# Altium PCB ESP32SSMB V1.4 .PcbDoc (part 2 of 2)
Units mm, origin at the board's own origin, x right, y up, seen from the top; angles counter-clockwise.
Board outline 43.94 x 35.18 mm, 2 copper layers (Top Layer, Bottom Layer), stack 1.671 mm thick; 76 components, 65 nets, 276 pads, 414 vias.
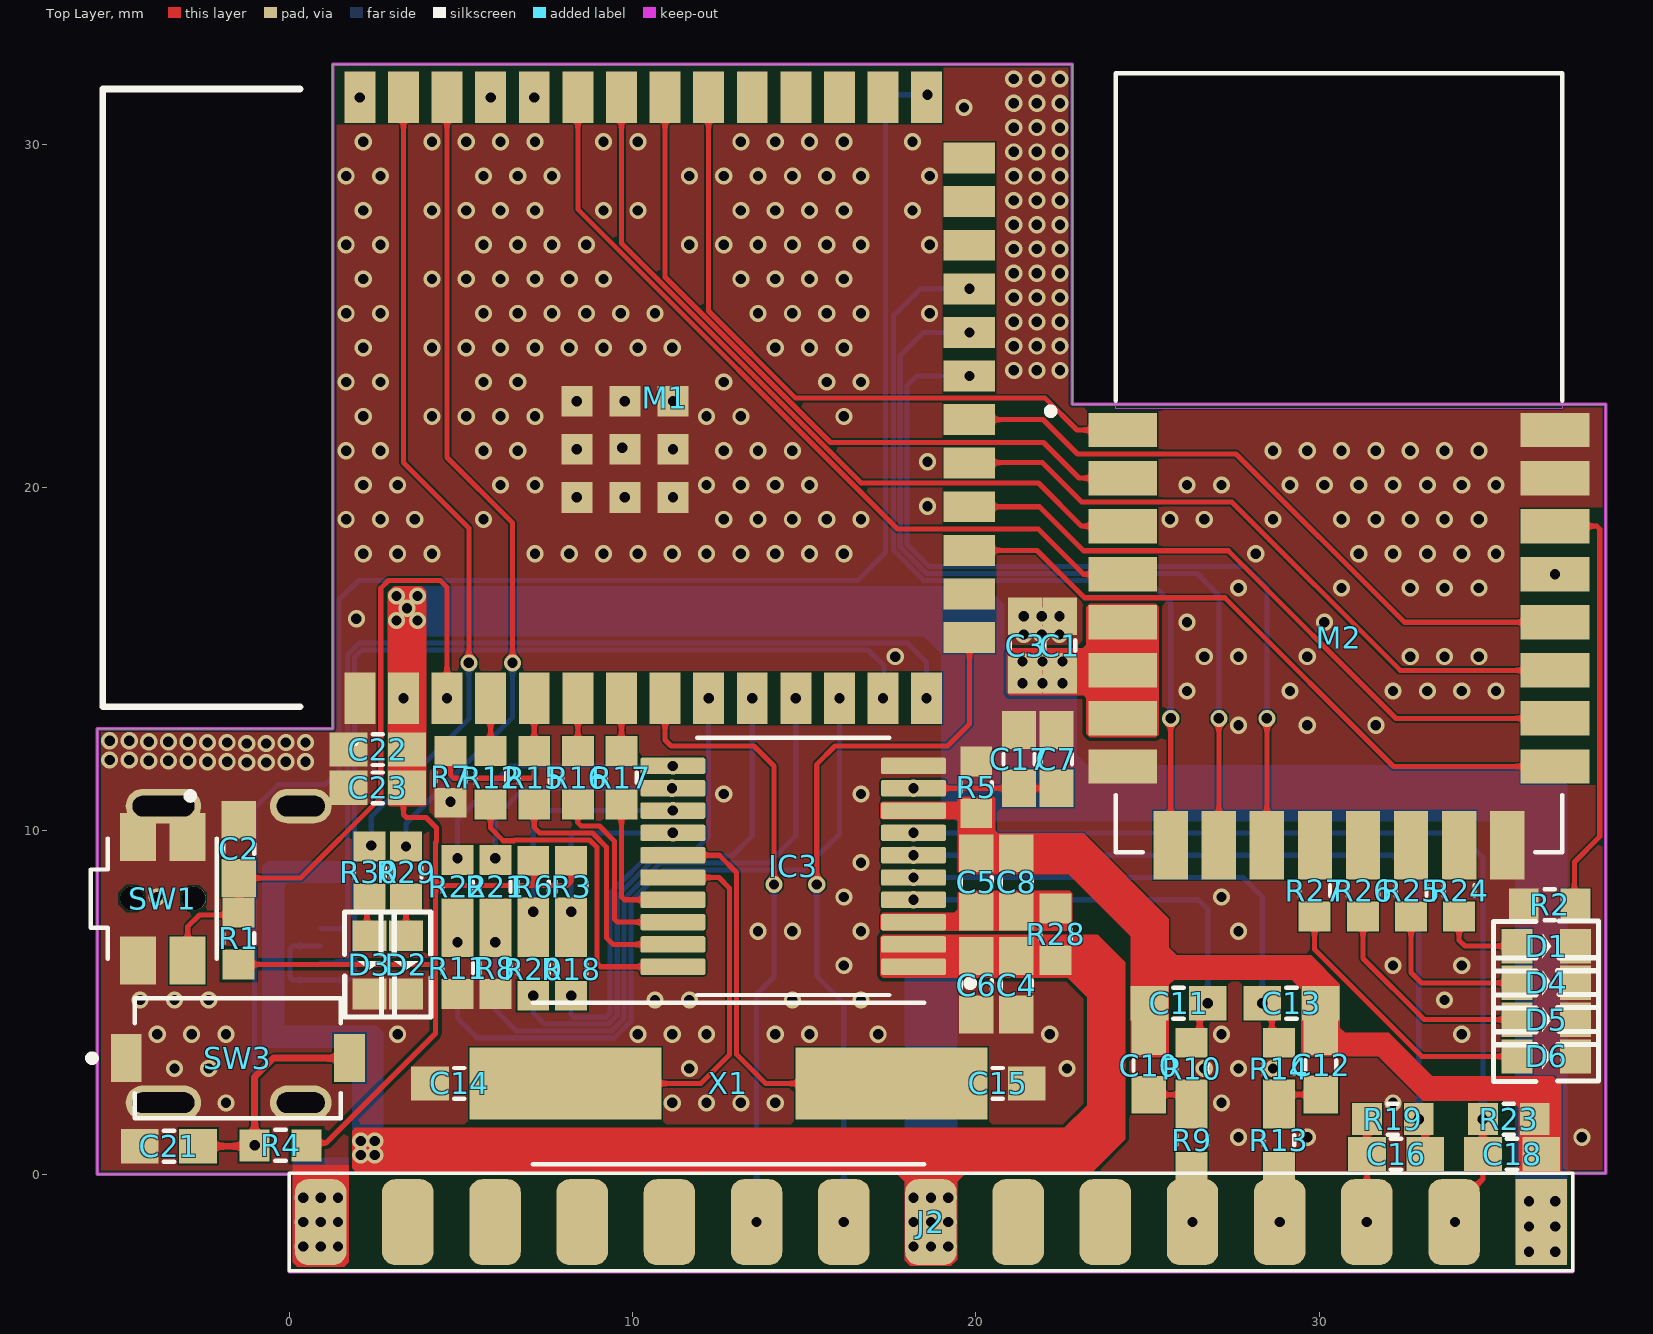
[diagram p0: Top Layer view]

## Via types
v1: diameter 0.5, hole 0.3, Top Layer to Bottom Layer, tented both sides, 414 vias

## Nets (pads, with @x,y where several pads share a name; then routed paths per layer and width w, separated by ;. In a path a pad name is that pad's centre, name@x,y a point inside that pad or via, vN(x,y) a via of type N, cw(c..) or ccw(c..) an arc to the next point about the centre after c; other vN are vias at no path point) (continued)
ADE-I\Q\R\: IC3.14 R3.2 R18.1 | length 6.1
  Top Layer w0.15: R18.1 R3.2 v1(8.211,7.643)
  Bottom Layer w0.15: v1(8.211,7.643) 8.211,9.853 8.299,9.941 v1(11.177,9.941)
ADE-MISO: M1.5 R7.2 R15.2 | length 5.5
  Top Layer w0.15: R7.2 4.699,11.633 4.801,11.532 7.047,11.532 7.135,11.619 7.135,12.327 R15.2 M1.5
ADE-MOSI: M1.4 R12.2 | length 1.5
  Top Layer w0.15: R12.2 M1.4
ADE-S\A\G\: IC3.13 R6.2 R20.1 | length 7.9
  Top Layer w0.15: R20.1 R6.2 v1(7.108,7.643)
  Bottom Layer w0.15: v1(7.108,7.643) 7.108,10.503 7.196,10.591 v1(11.177,10.591)
ADE-SCLK: M1.6 R16.2 | length 1.5
  Top Layer w0.15: R16.2 M1.6
ADE-ZX: M1.11 R8.2 R21.2 | length 20.3
  Top Layer w0.15: v1(6.005,6.756) R21.2@6.005,7.643
  Bottom Layer w0.15: v1(6.005,6.756) 6.005,4.79 6.623,4.172 9.386,4.172 9.757,4.543 9.757,8.023 10.799,9.065 13.967,9.065 14.757,9.855 v1(14.757,13.866)
AGND-ESP: C5.1 C8.1 C10.1 C11.1 C12.1 C13.1 C18.1 IC3.8 R5.1 R23.1
BOOT: C21.2 M1.27 R4.1 SW3.2 TP10.1 | length 55.2
  Top Layer w0.2: C21.2 -1.034,0.813 v1(-1.009,0.838) -1.009,2.826 -0.457,3.378 SW3.2
  Bottom Layer w0.15: v1(-1.009,0.838) -1.009,10.66 -0.323,11.346 1.043,11.346 1.445,11.748 1.445,16.722 2.02,17.297 16.561,17.297 17.374,18.11 17.374,31.115 17.704,31.445 v1(18.593,31.445)
CLK-IN: C15.1 IC3.15 X1.2 | length 12.2
  Top Layer w0.15: IC3.15 12.527,9.291 13.03,8.788 13.03,3.493 13.882,2.642 X1.2
CLK-OUT: C14.2 IC3.16 X1.1 | length 11.8
  Top Layer w0.15: X1.1 11.989,2.642 12.827,3.48 12.827,8.331 12.517,8.641 IC3.16
CUR-SHT-N-ESP: J2.07 J2.08 R13.1
  other v1: 28.854,-1.397
CUR-SHT-P-ESP: J2.09 J2.10 R9.1
  other v1: 26.314,-1.397
DN: J3.A7 J3.B7 M1.13 | length 29.6
  Bottom Layer w0.15: J3.A7 0.11,6.651 0.023,6.563 0.023,5.74 0.112,5.651 J3.B7 1.716,5.651 1.902,5.837 1.902,15.059 2.111,15.269 16.862,15.269 17.323,14.808 17.323,13.892 v1(17.297,13.866)
DP: J3.A6 J3.B6 M1.14 | length 28.8
  Bottom Layer w0.15: J3.A6 J3.A6@1.336,6.151 ; J3.B6 1.688,7.151 1.702,7.137 ; J3.A6@1.336,6.147 1.379,6.189 1.691,6.189 1.702,6.201 1.702,7.137 ; v1(18.567,13.866) 18.567,14.91 18.009,15.469 2.029,15.469 1.702,15.142 1.702,7.137
DWM3000-EXTON: M1.32 M2.1 | length 19.7
  Top Layer w0.15: M1.32 12.217,25.146 14.757,22.606 22.022,22.606 22.951,21.676 M2.1
DWM3000-IO4: M1.21 M2.11 | length 25.1
  Top Layer w0.15: M2.11 v1(28.482,13.276)
  Bottom Layer w0.15: v1(19.817,23.251) 18.273,23.251 17.999,22.977 17.999,18.349 18.65,17.697 27.845,17.697 28.482,17.061 v1(28.482,13.276)
DWM3000-IO5: M1.22 M2.10 | length 25
  Top Layer w0.15: M2.10 v1(27.082,13.276)
  Bottom Layer w0.15: v1(19.817,24.521) 18.471,24.521 17.799,23.849 17.799,18.266 18.567,17.497 26.445,17.497 27.082,16.86 v1(27.082,13.276)
DWM3000-IO6: M1.23 M2.9 | length 25.1
  Top Layer w0.15: M2.9@25.679,9.584 v1@25.679,13.276
  Bottom Layer w0.15: v1(19.817,25.791) 18.388,25.791 17.599,25.002 17.599,18.183 18.484,17.297 25.019,17.297 25.682,16.635 v1(25.682,13.276)
DWM3000-IQR: M2.22 R2.2 | length 12.6
  Top Layer w0.15: M2.22 38.091,18.876 38.179,18.789 38.179,9.833 37.44,9.093 37.44,7.882 R2.2
DWM3000-RSTn: M1.34 M2.3 | length 22.3
  Top Layer w0.15: M1.34 9.677,27.12 16.662,20.136 21.825,20.136 23.084,18.876 M2.3
DWM3000-SPI-CLK: M1.20 M2.20 | length 19.5
  Top Layer w0.15: M1.20 21.961,21.981 22.962,20.98 27.584,20.98 32.488,16.076 M2.20
DWM3000-SPI-CS: M1.17 M2.17 | length 19.7
  Top Layer w0.15: M1.17 21.783,18.171 23.165,16.789 27.254,16.789 32.167,11.876 M2.17
DWM3000-SPI-MISO: M1.19 M2.19 | length 19.6
  Top Layer w0.15: M1.19 19.833,20.726 21.946,20.726 23.089,19.583 27.457,19.583 32.364,14.676 M2.19
DWM3000-SPI-MOSI: M1.18 M2.18 | length 19.6
  Top Layer w0.15: M1.18 21.859,19.441 23.139,18.161 27.356,18.161 32.24,13.276 M2.18
DWM3000-SYNC: M1.35 M2.4 | length 23.5
  Top Layer w0.15: M1.35 8.407,28.107 17.719,18.796 21.819,18.796 23.138,17.476 M2.4
DWM3000-WAKEUP: M1.33 M2.2 | length 21
  Top Layer w0.15: M1.33 10.947,26.133 15.77,21.311 21.971,21.311 23.005,20.276 M2.2
ESP-I\Q\R\: M1.9 R18.2 | length 12.8
  Bottom Layer w0.15: v1(8.211,5.196) 8.211,4.66 8.299,4.572 9.22,4.572 9.347,4.699 9.347,8.179 10.633,9.465 11.852,9.465 12.217,9.83 v1(12.217,13.866)
ESP-S\A\G\: M1.10 R20.2 | length 15.3
  Bottom Layer w0.15: v1(7.108,5.196) 7.108,4.704 7.44,4.372 9.303,4.372 9.557,4.626 9.557,8.106 10.716,9.265 12.897,9.265 13.487,9.855 v1(13.487,13.866)
GND-ESP: C1.1 C2.1 C3.1 C4.1 C6.1 C7.1 C14.1 C15.2 C17.1 C21.1 C22.1 C23.1 D1.2 D2.2 D3.2 D4.2 D5.2 D6.2 IC1.1 IC3.10 J2.29 J2.30 J3.A1B12 J3.B1A12 J3.SHIELD M1.1 M1.40 M1.41 M1.42 M1.43 M1.44 M1.45 M1.46 M1.47 M1.48 M1.49 M2.8 M2.16 M2.21 M2.23 M2.24 R2.1 R5.2 R7.1 R8.1 R11.1 SW1.11 SW1.21 SW1.22 SW3.1 TP1.1
  other v1: 0.406,-2.108 0.914,-2.108 1.422,-2.108 0.406,-1.397 0.914,-1.397 1.422,-1.397 0.406,-0.686 0.914,-0.686 1.422,-0.686 27.657,1.075 29.657,1.075 37.657,1.075 -1.843,2.075 11.157,2.075 12.157,2.075 13.157,2.075 14.157,2.075 27.157,2.075 32.157,2.075 -3.343,3.075 -2.343,3.075 11.657,3.075 22.657,3.075 26.657,3.075 27.657,3.075 28.657,3.075 -3.843,4.075 -2.843,4.075 -1.843,4.075 3.157,4.075 10.157,4.075 11.157,4.075 12.157,4.075 14.157,4.075 15.157,4.075 17.157,4.075 22.157,4.075 27.157,4.075 34.157,4.075 -4.343,5.075 -3.343,5.075 -2.343,5.075 10.657,5.075 11.657,5.075 14.657,5.075 16.657,5.075 33.657,5.075 16.157,6.075 32.157,6.075 34.157,6.075 13.657,7.075 14.657,7.075 16.657,7.075 27.657,7.075 -3.843,8.075 16.157,8.075 27.157,8.075 16.657,9.075 4.699,10.846 12.657,11.075 16.657,11.075 -1.24,11.989 -0.67,11.989 -2.381,12.014 -1.81,12.014 -0.099,12.014 0.471,12.014 -4.092,12.04 -3.521,12.04 -2.951,12.04 -5.232,12.065 -4.662,12.065 -1.24,12.548 -0.67,12.548 -2.381,12.573 -1.81,12.573 -0.099,12.573 0.471,12.573 -4.092,12.598 -3.521,12.598 -2.951,12.598 -5.232,12.624 -4.662,12.624 27.657,13.075 29.657,13.075 31.657,13.075 26.157,14.075 29.157,14.075 32.157,14.075 33.157,14.075 34.157,14.075 35.157,14.075 17.657,15.075 26.657,15.075 27.657,15.075 29.657,15.075 32.657,15.075 33.657,15.075 34.657,15.075 21.399,15.723 21.92,15.723 22.441,15.723 26.157,16.075 30.157,16.075 1.956,16.18 21.399,16.256 21.92,16.256 22.441,16.256 27.657,17.075 30.657,17.075 32.657,17.075 33.657,17.075 34.657,17.075 36.877,17.476 2.157,18.075 3.157,18.075 4.157,18.075 7.157,18.075 8.157,18.075 9.157,18.075 10.157,18.075 11.157,18.075 12.157,18.075 13.157,18.075 14.157,18.075 15.157,18.075 16.157,18.075 28.157,18.075 31.157,18.075 32.157,18.075 33.157,18.075 34.157,18.075 35.157,18.075 1.657,19.075 2.657,19.075 3.657,19.075 5.657,19.075 12.657,19.075 13.657,19.075 14.657,19.075 15.657,19.075 16.657,19.075 25.657,19.075 26.657,19.075 28.657,19.075 30.657,19.075 31.657,19.075 32.657,19.075 33.657,19.075 34.657,19.075 18.593,19.456 8.377,19.716 9.777,19.716 11.177,19.716 2.157,20.075 3.157,20.075 6.157,20.075 7.157,20.075 12.157,20.075 13.157,20.075 14.157,20.075 15.157,20.075 26.157,20.075 27.157,20.075 29.157,20.075 30.157,20.075 31.157,20.075 32.157,20.075 33.157,20.075 34.157,20.075 35.157,20.075 18.593,20.752 1.657,21.075 2.657,21.075 5.657,21.075 6.657,21.075 12.657,21.075 13.657,21.075 14.657,21.075 28.657,21.075 29.657,21.075 30.657,21.075 31.657,21.075 32.657,21.075 33.657,21.075 34.657,21.075 8.377,21.116 11.177,21.116 9.703,21.158 2.157,22.075 4.157,22.075 5.157,22.075 6.157,22.075 7.157,22.075 12.157,22.075 13.157,22.075 16.157,22.075 8.377,22.516 9.777,22.516 11.177,22.516 1.657,23.075 2.657,23.075 5.657,23.075 6.657,23.075 12.657,23.075 15.657,23.075 16.657,23.075 21.107,23.415 21.78,23.415 22.454,23.415 2.157,24.075 4.157,24.075 5.157,24.075 6.157,24.075 7.157,24.075 8.157,24.075 9.157,24.075 10.157,24.075 11.157,24.075 14.157,24.075 15.157,24.075 16.157,24.075 21.107,24.122 21.78,24.122 22.454,24.122 21.107,24.829 21.78,24.829 22.454,24.829 1.657,25.075 2.657,25.075 5.657,25.075 6.657,25.075 7.657,25.075 8.657,25.075 9.657,25.075 10.657,25.075 13.657,25.075 14.657,25.075 15.657,25.075 16.657,25.075 18.657,25.075 21.107,25.537 21.78,25.537 22.454,25.537 2.157,26.075 4.157,26.075 5.157,26.075 6.157,26.075 7.157,26.075 8.157,26.075 9.157,26.075 13.157,26.075 14.157,26.075 15.157,26.075 16.157,26.075 21.107,26.244 21.78,26.244 22.454,26.244 21.107,26.951 21.78,26.951 22.454,26.951 1.657,27.075 2.657,27.075 5.657,27.075 6.657,27.075 7.657,27.075 8.657,27.075 11.657,27.075 12.657,27.075 13.657,27.075 14.657,27.075 15.657,27.075 16.657,27.075 18.657,27.075 21.107,27.659 21.78,27.659 22.454,27.659 2.157,28.075 4.157,28.075 5.157,28.075 6.157,28.075 7.157,28.075 9.157,28.075 10.157,28.075 13.157,28.075 14.157,28.075 15.157,28.075 16.157,28.075 18.157,28.075 21.107,28.366 21.78,28.366 22.454,28.366 1.657,29.075 2.657,29.075 5.657,29.075 6.657,29.075 7.657,29.075 11.657,29.075 12.657,29.075 13.657,29.075 14.657,29.075 15.657,29.075 16.657,29.075 18.657,29.075 21.107,29.073 21.78,29.073 22.454,29.073 21.107,29.781 21.78,29.781 22.454,29.781 2.157,30.075 4.157,30.075 5.157,30.075 6.157,30.075 7.157,30.075 9.157,30.075 10.157,30.075 13.157,30.075 14.157,30.075 15.157,30.075 16.157,30.075 18.157,30.075 21.107,30.488 21.78,30.488 22.454,30.488 19.657,31.075 21.107,31.195 21.78,31.195 22.454,31.195 2.057,31.366 21.107,31.902 21.78,31.902 22.454,31.902
LEAK_INT: J2.17 J2.18 M1.15 | length 21.1
  Top Layer w0.15: v1(15.367,8.438) 15.367,11.938 15.9,12.471 19.177,12.471 19.817,13.112 M1.15
  Bottom Layer w0.15: v1(15.367,8.438) 15.367,5.766 16.154,4.978 v1(16.154,-1.397)
NetC5_2: C5.2 C8.2 IC3.3 R28.1
NetC7_2: C7.2 C17.2 IC3.9 TP11.1 | length 4.2
  Top Layer w0.15: v1(18.187,11.241) C17.2 C7.2
NetC10_2: C10.2 R9.2 R10.1 | length 1.2
  Top Layer w0.15: C10.2 26.284,2.313 R10.1
NetC11_2: C11.2 IC3.4 R10.2 TP6.1 | length 12.7
  Top Layer w0.15: R10.2@26.524,4.063 C11.2@26.524,4.744
  Top Layer w0.4: R10.2 R10.2@26.524,4.063 ; C11.2@26.524,4.744 C11.2@26.739,4.96
  Bottom Layer w0.15: v1(18.187,7.991) 26.477,7.991 26.758,7.71 v1(26.758,4.978)
NetC12_2: C12.2 R13.2 R14.1 | length 1.2
  Top Layer w0.15: R14.1 C12.2
NetC13_2: C13.2 IC3.5 R14.2 TP7.1 | length 14.8
  Top Layer w0.15: C13.2@28.36,4.967 28.626,4.701 28.626,4.032 R14.2
  Bottom Layer w0.15: v1(18.187,8.641) 27.782,8.641 28.348,8.075 v1(28.348,4.978)
NetC16_2: C16.2 IC3.6 R19.2 TP8.1 | length 23
  Top Layer w0.15: R19.2@32.918,1.575 33.094,1.399 C16.2
  Bottom Layer w0.15: v1(18.187,9.291) 32.136,9.291 32.904,8.523 v1(32.904,1.6)
NetD1_1: D1.1 R24.2 | length 2.5
  Top Layer w0.15: R24.2 34.082,6.812 34.251,6.643 D1.1
NetD2_1: D2.1 R29.2 | length 1.1
  Top Layer w0.15: D2.1 R29.2@3.404,8.059
NetD3_1: D3.1 R30.2 | length 1.2
  Top Layer w0.15: D3.1 2.261,7.022 2.261,7.957 R30.2
NetD4_1: D4.1 R25.2 | length 4.8
  Top Layer w0.15: R25.2 32.682,5.876 32.986,5.572 D4.1
NetD5_1: D5.1 R26.2 | length 6.5
  Top Layer w0.15: R26.2 31.282,6.285 33.066,4.5 D5.1
NetD6_1: D6.1 R27.2 | length 8.2
  Top Layer w0.15: R27.2 29.87,6.55 32.991,3.429 D6.1
NetIC3_11: IC3.11 R22.1 | length 8
  Bottom Layer w0.15: v1(4.902,9.203) 4.902,10.333 6.46,11.891 v1(11.177,11.891)
NetIC3_12: IC3.12 R21.1 | length 6.7
  Bottom Layer w0.15: v1(6.005,9.203) 6.005,10.399 6.847,11.241 v1(11.151,11.241)
NetIC3_17: IC3.17 R17.1 | length 4.2
  Top Layer w0.15: R17.1 9.677,8.079 9.765,7.991 IC3.17
NetIC3_18: IC3.18 R16.1 | length 5.8
  Top Layer w0.15: R16.1 8.407,10.236 8.506,10.138 9.039,10.138 9.471,9.706 9.471,7.429 9.559,7.341 IC3.18
NetIC3_19: IC3.19 R15.1 | length 7.7
  Top Layer w0.15: R15.1 7.137,10.095 7.295,9.938 8.832,9.938 9.246,9.524 9.246,6.887 9.441,6.691 IC3.19
NetIC3_20: IC3.20 R12.1 | length 9.7
  Top Layer w0.15: R12.1 5.867,10.08 6.235,9.713 6.546,9.713 6.571,9.738 8.749,9.738 8.966,9.52 8.966,6.147 9.072,6.041 IC3.20
NetM1_38: M1.38 R29.1 | length 23.9
  Top Layer w0.15: M1.38 4.597,20.879 6.502,18.974 v1(6.502,14.894)
  Bottom Layer w0.15: v1(3.404,9.543) 3.404,10.211 6.502,13.31 v1(6.502,14.894)
NetM1_39: M1.39 R30.1 | length 23.8
  Top Layer w0.15: M1.39 3.327,20.726 5.232,18.821 v1(5.232,14.894)
  Bottom Layer w0.15: v1(2.388,9.576) 2.388,10.414 5.232,13.259 v1(5.232,14.894)
NetM2_12: M2.12 R27.1
NetM2_13: M2.13 R26.1
NetM2_14: M2.14 R25.1
NetM2_15: M2.15 R24.1
POWER_L_D: C16.1 J2.05 J2.06 R19.1 | length 3
  Top Layer w0.15: v1(31.394,-1.397) C16.1 R19.1
POWER_N_D: C18.2 IC3.7 J2.03 J2.04 R23.2 TP9.1 | length 27.9
  Top Layer w0.15: J2.03 33.934,-0.981 34.774,-0.141 C18.2 34.774,1.598 R23.2@34.773,1.6
  Bottom Layer w0.15: v1(18.187,9.941) 34.052,9.941 34.773,9.22 TP9.1
  other v1: 33.96,-1.397 34.774,1.6
RELAY: J2.19 J2.20 M1.8 | length 18.2
  Top Layer w0.15: M1.8 10.947,12.649 11.125,12.471 13.538,12.471 14.122,11.887 v1(14.122,8.438)
  Bottom Layer w0.15: v1(13.614,-1.397) 13.614,5.232 14.122,5.74 v1(14.122,8.438)
RESET: C2.2 M1.3 R1.1 SW1.12 TP12.1 | length 20.2
  Top Layer w0.15: SW1.12 -2.958,7.211 -2.617,7.551 -1.543,7.551 R1.1 C2.2 0.328,8.624 2.667,10.963 2.667,17.069 2.893,17.295 4.397,17.295 4.597,17.094 v1(4.597,13.866)
RXD0: M1.36 TP3.1
  other v1: 7.137,31.366
TXD0: M1.37 TP2.1
  other v1: 5.867,31.366
pads on no net: IC1.2 J2.11 J2.12 J2.13 J2.14 J2.21 J2.22 J2.23 J2.24 J2.25 J2.26 J2.27 J2.28 J3.A5 J3.A8 J3.B5 J3.B8 M1.16 M1.24 M1.25 M1.26 M1.28 M1.29 M1.30 M1.31 SW1.

## Polygon pours and split planes (outlines as drawn)
GND-ESP on Top Layer "GND-ESP_L01_P000" (solid, remove dead copper, pour order 0): -5.588,0 0,0 0,-2.845 37.389,-2.845 37.389,0.025 38.354,0.025 38.354,22.432 22.809,22.432 22.809,32.334 1.27,32.334 1.27,12.979 -5.588,12.979
GND-ESP on Bottom Layer "GND-ESP_L02_P001" (solid, remove dead copper, pour order 1): -5.588,0 0,0 0,-2.845 37.389,-2.845 37.389,0.025 38.354,0.025 38.354,22.432 22.81,22.432 22.81,32.334 1.27,32.334 1.27,12.979 -5.588,12.979

## Keep-outs
Keep-Out Layer:
  the board outline again, w0.1

## Other copper
Top Layer:
  region net NetC5_2: 17.221,7.151 17.221,7.544 17.297,7.62 19.38,7.62 19.482,7.722 19.482,8.204 19.533,8.255 22.733,8.255 22.809,8.179 22.809,7.163 22.733,7.087 17.285,7.087
  region net 3V3-ESP: 2.909,10.719 3.937,10.719 3.988,10.77 3.988,16.993 3.861,17.12 3.048,17.12 2.873,16.945 2.873,10.754
  pour cut-out: 35.827,11.326 35.827,19.426 38.252,19.426 38.252,11.326
  pour cut-out: 25.132,8.531 34.632,8.531 34.632,10.631 25.132,10.631
  pour cut-out: 19.067,13.066 2.743,13.066 2.743,14.666 19.067,14.666
  pour cut-out: 19.017,30.101 20.617,30.101 20.617,15.131 19.017,15.131
  pour cut-out: 1.378,32.226 1.378,30.566 19.067,30.566 19.067,32.226
  region net GND-ESP: 0.102,-2.565 0.229,-2.692 1.6,-2.692 1.727,-2.565 1.727,0.254 0.102,0.254
  region net 3V3-ESP: 20.904,14.021 20.98,13.945 23.139,13.945 23.216,13.868 23.216,12.827 23.317,12.725 25.248,12.725 25.324,12.802 25.324,16.535 25.248,16.612 23.317,16.612 23.216,16.51 23.216,15.418 23.114,15.316 21.006,15.316 20.904,15.215
  region net 5V-ESP: 1.829,0.177 1.981,0.025 17.678,0.025 17.932,-0.229 17.932,-2.515 18.085,-2.667 19.279,-2.667 19.456,-2.489 19.456,-0.229 19.71,0.025 23.368,0.025 24.359,1.016 24.359,6.172 23.558,6.973 17.291,6.973 17.221,6.903 17.221,5.791 17.297,5.715 22.682,5.715 23.241,5.156 23.241,2.007 22.581,1.346 1.905,1.346 1.829,1.27
  region net AGND-ESP: 17.272,10.338 17.221,10.389 17.221,10.795 17.272,10.846 19.431,10.846 19.482,10.897 19.482,10.947 19.533,10.998 20.523,10.998 20.574,10.947 20.574,10.008 20.65,9.931 21.768,9.931 23.139,9.931 25.629,7.442 25.629,6.604 25.857,6.375 29.769,6.375 30.607,5.537 30.607,4.267 30.759,4.115 32.029,4.115 33.299,2.845 36.83,2.845 37.059,2.616 37.059,0.102 37.008,0.051 35.865,0.051 35.814,0.102 35.814,1.93 35.611,2.134 33.02,2.134 31.725,3.429 29.591,3.429 29.489,3.531 29.489,5.385 29.21,5.664 25.781,5.664 25.629,5.512 25.629,3.48 25.552,3.404 24.587,3.404 24.511,3.48 24.511,6.934 22.708,8.738 19.558,8.738 19.482,8.814 19.482,10.287 19.431,10.338
Bottom Layer:
  region net 5V-ESP: 1.91,0.096 2.641,0.101 2.743,0.203 2.743,4.115 2.54,4.318 -0.102,4.318 -0.152,4.369 -0.152,8.357 -0.025,8.484 1.473,8.484 1.499,8.509 1.499,9.093 1.473,9.119 -0.635,9.119 -0.787,8.966 -0.787,3.759 -0.711,3.683 1.727,3.683 1.829,3.581 1.829,0.177
  region net GND-ESP: 0.102,-2.565 0.229,-2.692 1.6,-2.692 1.727,-2.565 1.727,0.483 0.102,0.483
  region net 3V3-ESP: 35.916,-2.642 37.059,-2.642 37.236,-2.464 37.236,11.709 37.033,11.913 23.241,11.913 22.936,12.217 22.936,15.113 22.733,15.316 20.98,15.316 20.828,15.469 20.828,16.586 20.294,17.12 3.048,17.12 2.87,16.942 2.87,15.85 3.048,15.672 18.491,15.672 18.996,15.167 19,10.718 19.431,10.287 35.331,10.287 35.712,9.906 35.712,-2.438
  region net 5V-ESP: 18.085,-2.667 19.279,-2.667 19.456,-2.489 19.456,6.121 19.101,6.477 18.263,6.477 17.932,6.147 17.932,-2.515

## Silkscreen, mask and mechanical layers (free items; w line width, h text height)
Bottom Overlay:
  drawing of 30 lines, arcs and shapes, not listed
  text "TX0" at 5.497,28.981 h1 r270
  text "RX0" at 6.793,28.931 h1 r270
  text "GND" at 34.239,17.794 h1 r180
  text "RESET" at 4.278,14.605 h1 r270
  text "3V3" at 3.008,14.58 h1 r270
  text "VREF" at 15.114,11.582 h1 r180
  text "V1P" at 27.127,4.342 h1 r90
  text "V1N" at 28.677,4.342 h1 r90
  text "V2P" at 34.417,2.262 h1 r270
  text "V2N" at 32.639,2.211 h1 r270
  text "BOOT" at -0.356,1.157 h1 r180